# EAGLE board usb-audio01.job (EAGLE 6.2)
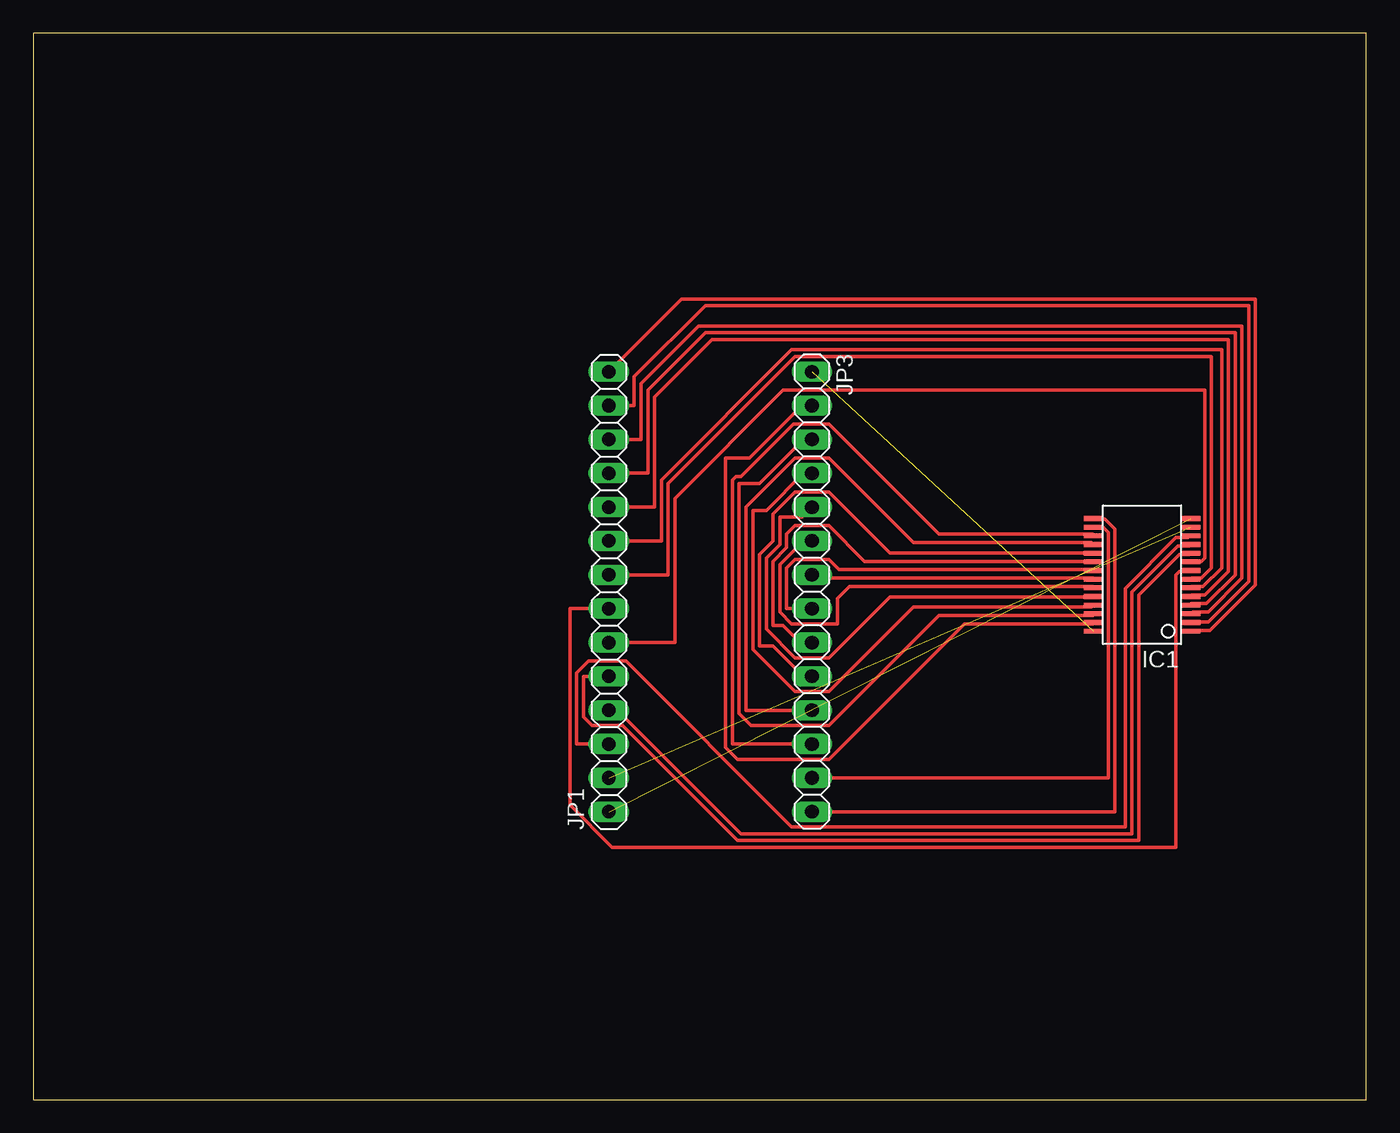
[diagram p0: board, top side]

Size 100 x 80 mm. Coordinates in mm from the lower left corner, seen from the top.
Outline: 0,0 100,0 100,80 0,80 0,0
Copper layers 1: Top 0.035mm
Design rules: minimum track width 10mil, minimum drill 24mil, track to track 8mil, track to pad 8mil, pad to pad 8mil, via to via 8mil, smd to smd 8mil, copper to edge 40mil, drill to drill 8mil, minimum pad ring 10mil, minimum via ring 8mil, stop-mask expansion 4mil, vias tented up to drill 0mil, thermal gap 10mil

## Footprints (pad centres in the part's own frame; a part is rotated, then mirrored left to right if it is on the bottom)
SSOP28DB = smd 0.348 x 1.397: 1 -4.225,-3.656; 2 -3.575,-3.656; 3 -2.925,-3.656; 4 -2.275,-3.656; 5 -1.625,-3.656; 6 -0.975,-3.656; 7 -0.325,-3.656; 8 0.325,-3.656; 9 0.975,-3.656; 10 1.625,-3.656; 11 2.275,-3.656; 12 2.925,-3.656; 13 3.575,-3.656; 14 4.225,-3.656; 15 4.225,3.656; 16 3.575,3.656; 17 2.925,3.656; 18 2.275,3.656; 19 1.625,3.656; 20 0.975,3.656; 21 0.325,3.656; 22 -0.325,3.656; 23 -0.975,3.656; 24 -1.625,3.656; 25 -2.275,3.656; 26 -2.925,3.656; 27 -3.575,3.656; 28 -4.225,3.656
1X14 = drill 1.016 long: 1 -16.51,0; 2 -13.97,0; 3 -11.43,0; 4 -8.89,0; 5 -6.35,0; 6 -3.81,0; 7 -1.27,0; 8 1.27,0; 9 3.81,0; 10 6.35,0; 11 8.89,0; 12 11.43,0; 13 13.97,0; 14 16.51,0

## Placement (x,y rotation side)
IC1  PCM2902E  [SSOP28DB]  83.19,39.37 90 top
JP1  [1X14]  43.18,38.1 90 top
JP3  [1X14]  58.42,38.1 270 top

## Library data of the parts
IC1 = texas; MF: TEXAS INSTRUMENT CONNECTORS; MPN: PCM2902E; OC_FARNELL: 1207089; OC_NEWARK: 75C5380
JP1 JP3 = pinhead

## Nets
N$1: IC1.28 JP3.1
N$2: IC1.27 JP3.2
N$3: IC1.26 JP3.3
N$4: IC1.25 JP3.4
N$5: IC1.24 JP3.5
N$6: IC1.23 JP3.6
N$7: IC1.22 JP3.7
N$8: IC1.21 JP3.8
N$9: IC1.20 JP3.9
N$10: IC1.19 JP3.10
N$11: IC1.18 JP3.11
N$12: IC1.17 JP3.12
N$13: IC1.16 JP3.13
N$14: IC1.15 JP3.14
N$15: IC1.14 JP1.1
N$16: IC1.13 JP1.2
N$17: IC1.12 JP1.3
N$18: IC1.11 JP1.4
N$19: IC1.10 JP1.5
N$20: IC1.9 JP1.6
N$21: IC1.8 JP1.7
N$22: IC1.7 JP1.8
N$23: IC1.6 JP1.9
N$24: IC1.5 JP1.10
N$25: IC1.4 JP1.11
N$26: IC1.3 JP1.12
N$27: IC1.2 JP1.13
N$28: IC1.1 JP1.14

## Tracks (layer width: path | path; a pad name or v marks a point on that pad's centre or on a via)
N$1  (1 unrouted)
N$2
  Top 0.254: JP3.2 57.66,52.07 53.72,48.13 51.94,48.13 51.94,26.42 52.83,25.53 59.69,25.53 69.85,35.69 79.5,35.69 IC1.27
N$3
  Top 0.254: JP3.3 57.78,49.53 54.48,46.23 52.96,46.23 52.96,28.96 53.85,28.07 59.69,28.07 67.94,36.32 79.5,36.32 IC1.26
N$4
  Top 0.254: JP3.4 57.78,46.99 54.99,44.2 53.98,44.2 53.98,33.78 57.15,30.61 59.69,30.61 66.04,36.96 79.38,36.96 79.5,37.08 IC1.25
N$5
  Top 0.254: JP3.5 57.66,43.69 56.01,43.69 56.01,41.66 54.99,40.64 54.99,35.31 57.15,33.15 59.69,33.15 64.26,37.72 79.5,37.72 IC1.24
N$6
  Top 0.254: JP3.6 57.78,41.91 56.01,40.13 56.01,36.58 56.9,35.69 60.33,35.69 60.33,37.59 61.21,38.48 79.5,38.48 IC1.23
N$7
  Top 0.254: JP3.7 58.67,39.12 79.5,39.12 IC1.22
N$8
  Top 0.254: JP3.8 56.52,36.83 56.52,39.88 57.15,40.51 59.69,40.51 60.45,39.75 79.5,39.75 IC1.21
N$9
  Top 0.254: JP3.9 57.53,34.29 56.26,35.56 55.5,35.56 55.5,40.39 56.52,41.4 56.52,42.42 57.15,43.05 59.69,43.05 62.36,40.39 79.5,40.39 IC1.20
N$10
  Top 0.254: JP3.10 57.78,31.75 55.5,34.04 54.48,34.04 54.48,40.89 55.5,41.91 55.5,43.94 57.15,45.59 59.69,45.59 64.26,41.02 79.5,41.02 IC1.19
N$11
  Top 0.254: JP3.11 53.47,29.21 53.47,44.45 57.15,48.13 59.69,48.13 66.04,41.78 79.38,41.78 79.5,41.66 IC1.18
N$12
  Top 0.254: JP3.12 52.45,26.67 52.45,46.48 52.7,46.74 53.09,46.74 57.02,50.67 59.69,50.67 67.94,42.42 79.5,42.42 IC1.17
N$13
  Top 0.254: JP3.13 80.64,24.13 80.64,42.55 80.26,42.93 79.63,42.93 IC1.16
N$14
  Top 0.254: JP3.14 81.15,21.59 81.15,42.8 80.39,43.56 79.63,43.56 IC1.15
N$15  (1 unrouted)
N$16  (1 unrouted)
N$17
  Top 0.254: JP1.3 40.77,26.67 40.77,32 41.66,32.89 44.45,32.89 56.9,20.45 81.92,20.45 81.92,38.35 85.72,42.16 86.61,42.16 86.74,42.29 IC1.12
N$18
  Top 0.254: JP1.4 43.81,29.21 53.09,19.94 82.42,19.94 82.42,38.1 85.85,41.53 86.74,41.53 IC1.11
N$19
  Top 0.254: JP1.5 41.27,31.75 41.27,28.7 41.91,28.07 44.2,28.07 52.83,19.43 82.93,19.43 82.93,37.85 85.98,40.89 86.74,40.89 IC1.10
N$20
  Top 0.254: JP1.6 48.13,34.29 48.13,45.09 56.26,53.21 87.88,53.21 87.88,40.64 87.63,40.39 86.87,40.39 IC1.9
N$21
  Top 0.254: JP1.7 40.26,36.83 40.26,22.1 43.43,18.92 85.72,18.92 85.72,39.37 85.98,39.62 86.74,39.62 IC1.8
N$22
  Top 0.254: JP1.8 47.62,39.37 47.62,46.23 57.15,55.75 88.39,55.75 88.39,39.88 87.63,39.12 86.87,39.12 IC1.7
N$23
  Top 0.254: JP1.9 47.12,41.91 47.12,46.48 56.9,56.26 89.15,56.26 89.15,39.88 87.76,38.48 86.87,38.48 IC1.6
N$24
  Top 0.254: JP1.10 46.61,44.45 46.61,52.7 50.93,57.02 89.66,57.02 89.66,39.62 87.88,37.85 86.87,37.85 IC1.5
N$25
  Top 0.254: JP1.11 46.1,46.99 46.1,53.21 50.42,57.53 90.17,57.53 90.17,39.37 88.01,37.21 86.87,37.21 IC1.4
N$26
  Top 0.254: JP1.12 45.59,49.53 45.59,53.72 49.91,58.04 90.68,58.04 90.68,39.12 88.14,36.58 87,36.58 86.87,36.45 IC1.3
N$27
  Top 0.254: JP1.13 45.09,52.07 45.09,54.23 50.42,59.56 91.19,59.56 91.19,38.86 88.14,35.81 86.87,35.81 IC1.2
N$28
  Top 0.254: JP1.14 48.64,60.07 91.69,60.07 91.69,38.61 88.27,35.18 86.87,35.18 IC1.1